# Altium PCB booster.PcbDoc
Units mm, origin at the board's own origin, x right, y up, seen from the top; angles counter-clockwise.
Board outline 164.34 x 131.06 mm, 2 copper layers (Top Layer, Bottom Layer); 86 components, 44 nets, 236 pads, 353 vias.
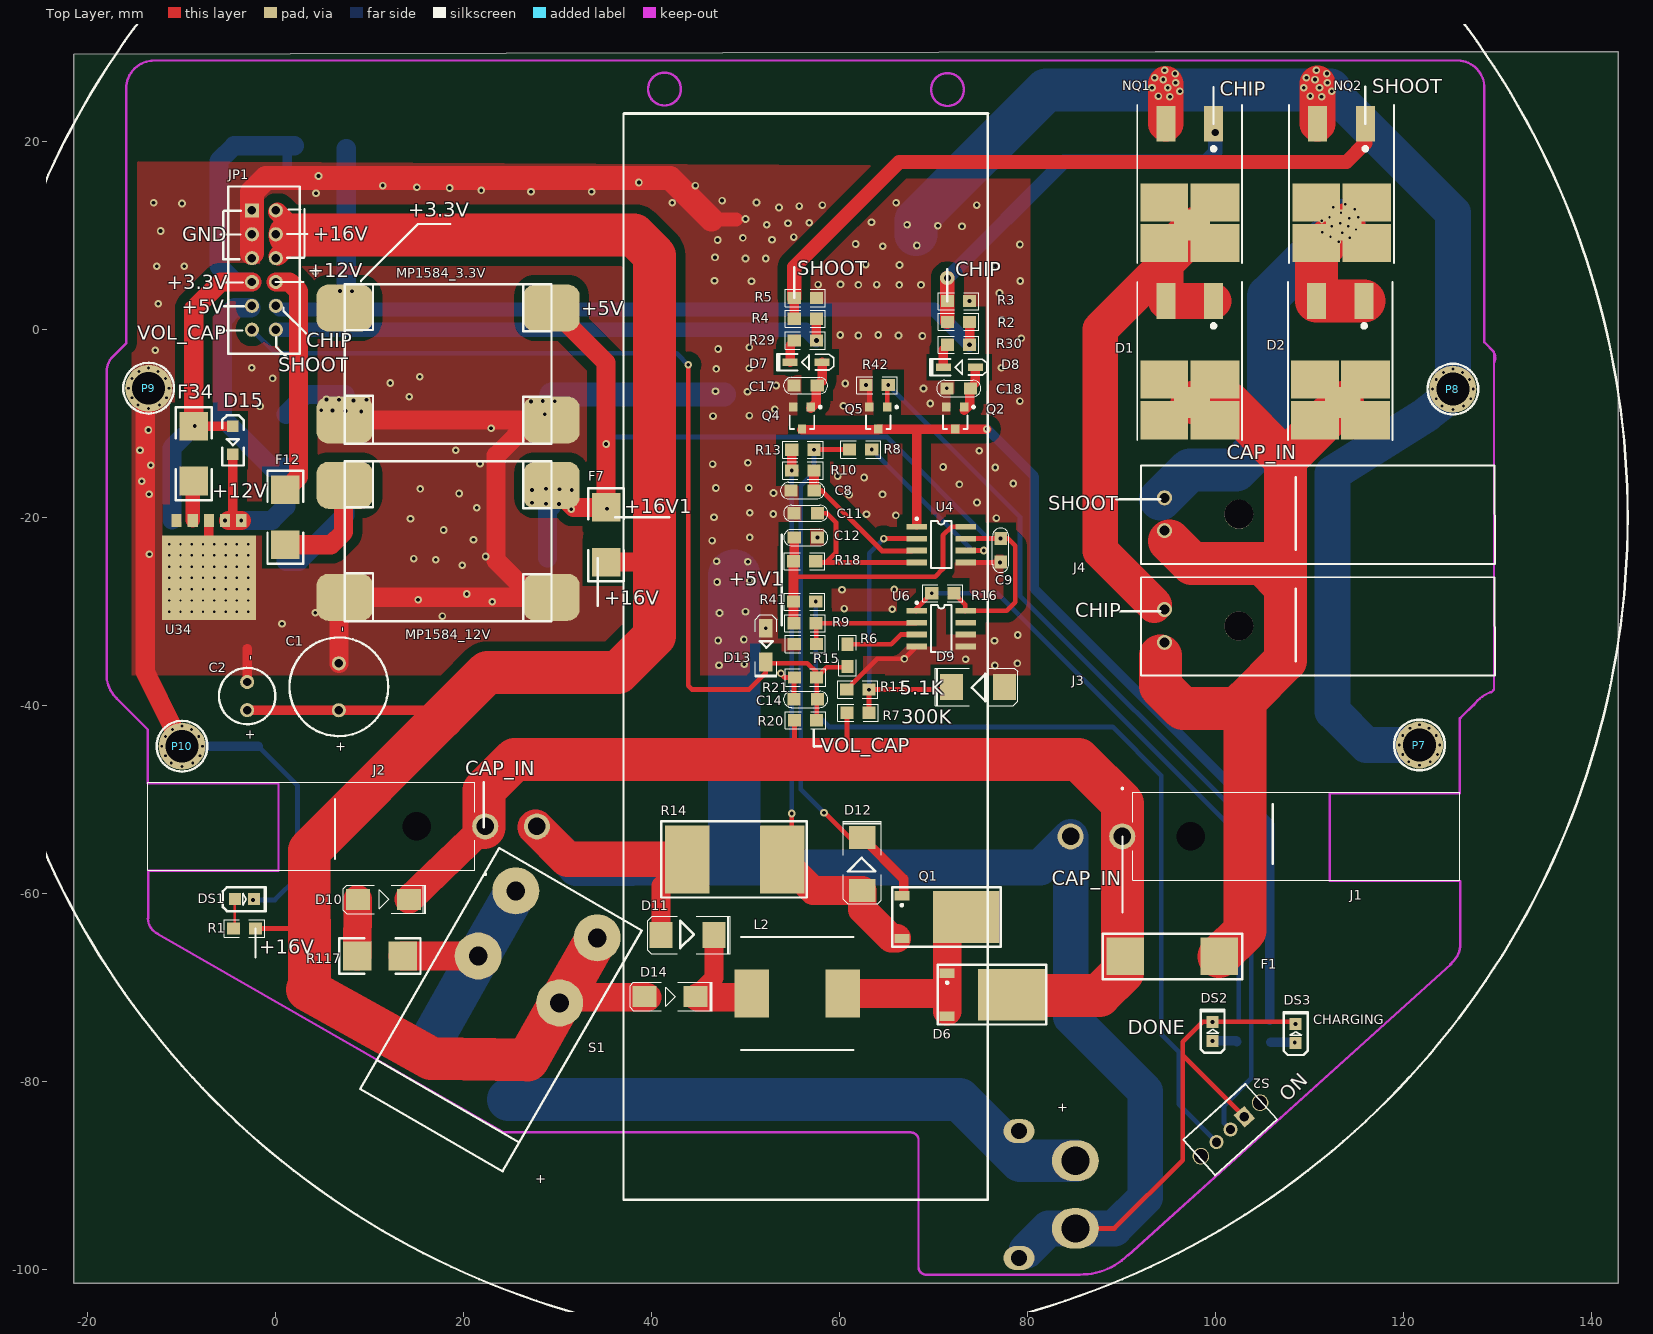
[diagram p0: Top Layer view]
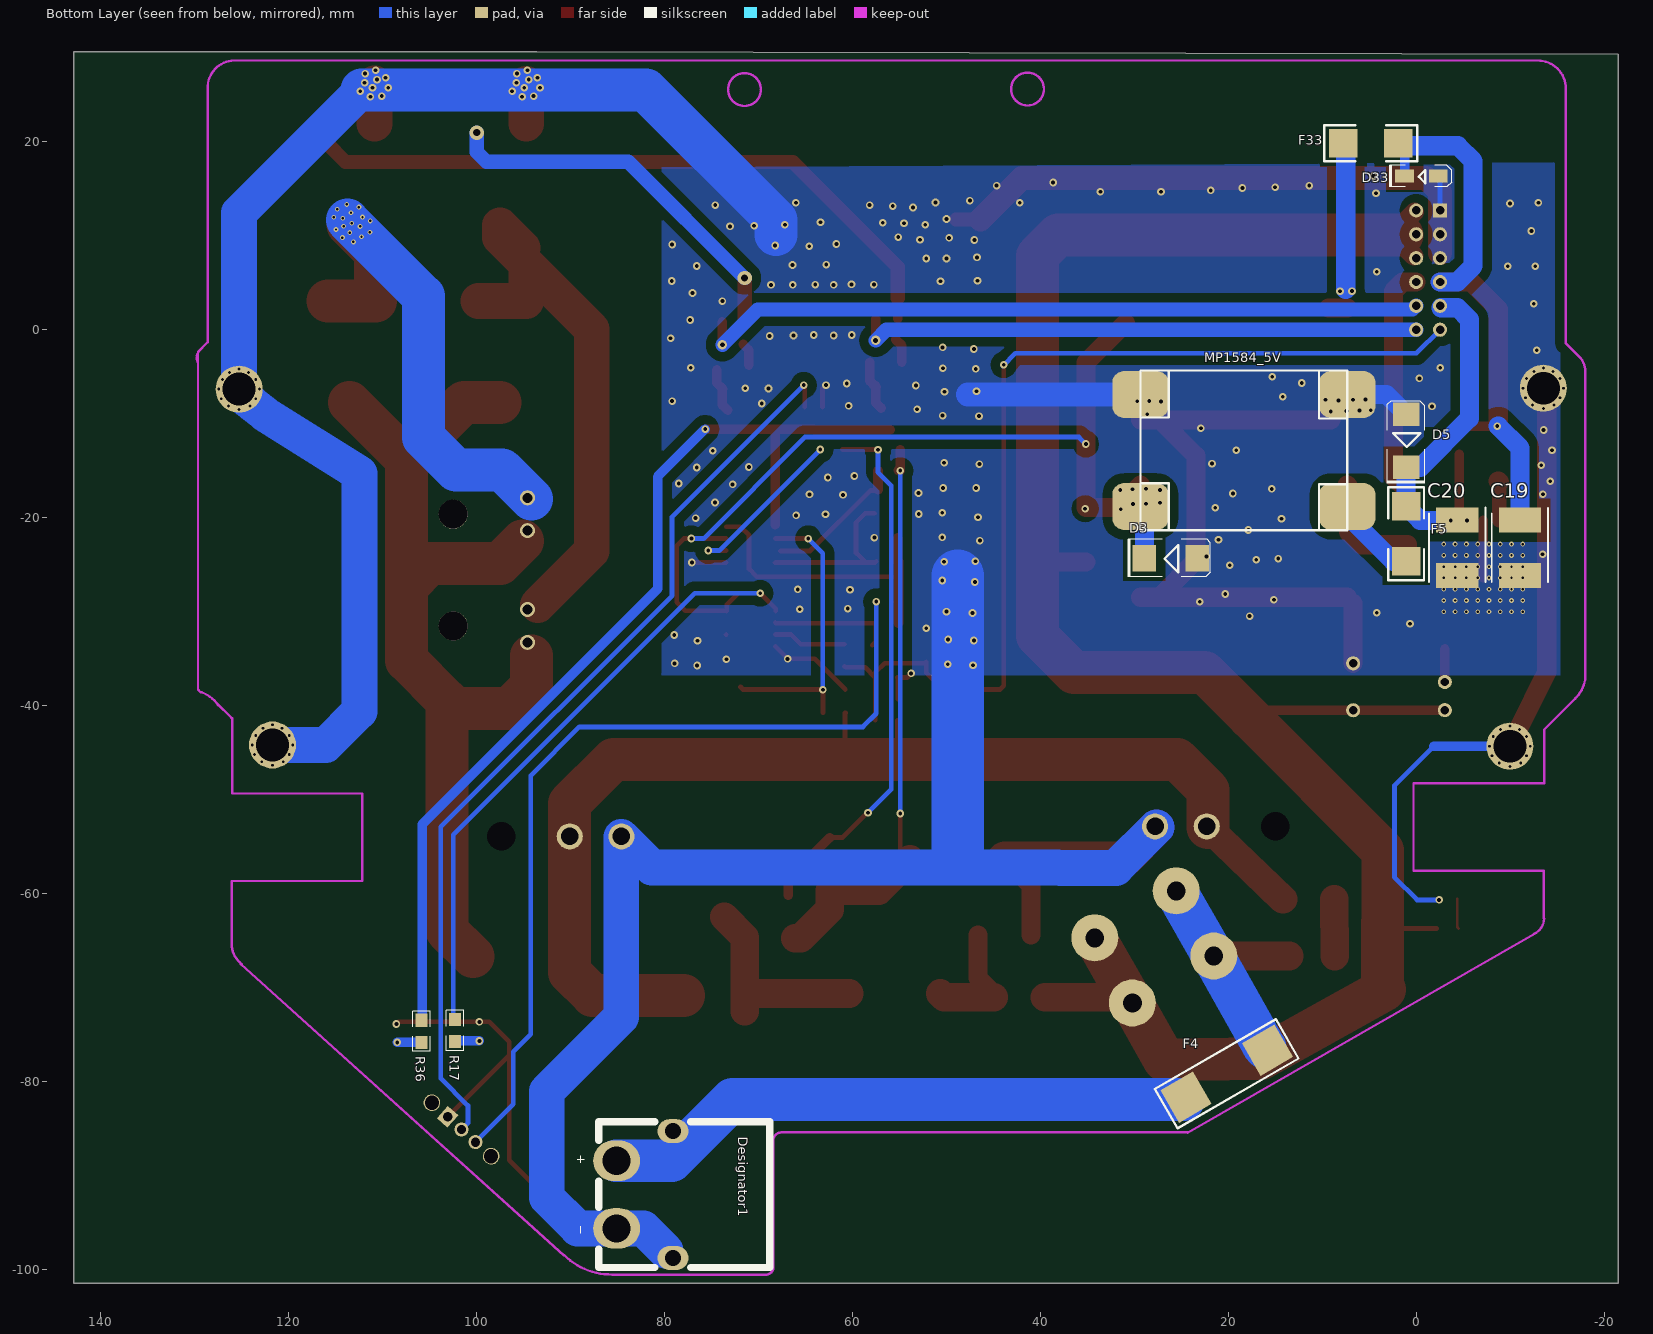
[diagram p1: Bottom Layer view, seen from below]

## Layer stack, top to bottom
Top Solder: solder mask 0.0102, Solder Resist, Dk 3.5
Top Layer: signal copper 0.0356
Dielectric1: dielectric 0.32, FR-4, Dk 4.8
Bottom Layer: signal copper 0.0356
Bottom Solder: solder mask 0.0102, Solder Resist, Dk 3.5

## Board outline
-21.488,29.312 -21.488,-101.498 23.216,-101.498 142.85,-101.498 142.85,-62.89 142.85,29.566 93.574,29.566

## Design rules (kind name [scope] priority, off if disabled: settings)
Clearance [InNet('GND') And InPolygon] p1: gap=1.016 ignorepadtopadclearanceinfootprint=FALSE
Clearance Clearance_1 [All] p2: gap=0.254 ignorepadtopadclearanceinfootprint=FALSE except(0: Arc-Hole Track-Hole SMDPad-Hole THPad-Hole Via-Hole Fill-Hole Poly-Hole Region-Hole Text-Hole)
ComponentClearance [All] p1: gap=0.025 collisioncheckmode=3 verticalgap=0.254 showdistances=FALSE
FabricationTestPointUsage TestPointUsage [All] p1: valid=0 allowmultiple=FALSE
FabricationTestpoint Testpoint [All] p1: side=3 testpointundercomponent=TRUE minsize=1.016 maxsize=2.54 preferedsize=1.524 minholesize=0 maxholesize=1.016 preferedholesize=0.813 testpointgrid=0.025 allowsidetop=TRUE allowsidebottom=TRUE usegrid=TRUE gridtolerance=0
HoleSize [All] p1: absolutevalues=TRUE maxlimit=7.62 minlimit=0.025 maxpercent=80.000 minpercent=20.000
PolygonConnect [All] p1: connectstyle=Direct reliefconductorwidth=0.889 reliefentries=4 polygonreliefangle="90 Angle" airgapwidth=0.254
RoutingVias [All] p1: holewidth=0.711 width=1.27 viastyle="Through Hole" minholewidth=0.305 minwidth=0.635 maxholewidth=7.112 maxwidth=22.86
SilkToSolderMaskClearance SilkscreenOverComponentPads [IsPad] p1: minsilkscreentomaskgap=0.254 clearancetoexposedcopper=TRUE
SolderMaskExpansion [All] p1: expansion=0.102
Width [All] p1: maxlimit=7.62 minlimit=0.254 preferedwidth=2.032
25 further rules are at their usual default settings.

## Components (designator, comment, footprint, x,y, rotation, side; value= is the part's Value field where it differs from the comment)
C1 "330uF" 470uF 6.706,-37.998 r90 top
C2 "100uf" 100uF -3.048,-38.989 r90 top value=100uF
C8 "470p" 0805C 57.201,-17.122 r180 top
C9 "0.1uF" 0805C 77.14,-24.613 r90 top
C11 "2.2nf" 0805C 57.531,-19.535 r180 top value=2.2nF
C12 "0.1uf" 0805C 55.271,-22.126 r0 top value=0.1uF
C14 "0.1uF" 0805C 55.245,-39.33 r0 top
C17 "0.1uF" 0805c 55.236,-5.944 r0 top
C18 "0.1uF" 0805c 71.543,-6.248 r0 top
C19 "CAP470" CAPPM7360X200N -11.049,-23.219 r270 bottom
C20 "CAP470" CAPPM7360X200N -4.369,-23.19 r270 bottom
D1 "MBRB40250CT" D2PAK 99.797,3.073 r90 top
D2 "MBRB40250CT" D2PAK 115.824,3.073 r90 top
D3 "SMBJ18A" SMBJ6.5 23.8,-24.308 r180 bottom
D5 "SMBJ6.5CA" SMBJ6.5 1.067,-9.5 r90 bottom
D6 "VS-8EWS12SLHM3" DPAK 74.879,-70.764 r270 top
D7 "mmsz9v1t1g" sod-123 58.141,-3.454 r0 top
D8 "mmsz9v1t1g" sod-123 74.448,-3.988 r0 top
D9 "SMBJ6.5CA" SMBJ6.5 77.041,-38.024 r0 top
D10 "M7" SMA 9.22,-60.63 r180 top
D11 "SMBJ18A" SMBJ6.5 41.504,-64.414 r180 top
D12 "SMBJ18A" SMBJ6.5 62.408,-59.184 r270 top
D13 "SMF3.3" SMF33 52.146,-37.345 r90 top
D14 "M7" SMA 39.731,-70.968 r180 top
D15 "MBR120VLSFT1G SOD123" sod123 -4.572,-10.259 r270 top
D33 "SMF3.3" SMF33 3.218,16.358 r180 bottom
Designator1 "Comment" XT60PW 85.096,-88.316 r270 bottom locked
DS1 "LED2" 0805A -4.369,-60.604 r0 top
DS2 "LED2" 0805A 99.695,-75.692 r90 top
DS3 "LED3" 0805A 108.534,-75.921 r90 top
F1 "20A" 20A 93.574,-67.208 r0 top
F4 "20A" 20A 18.822,-77.826 r330 bottom
F5 "3A" 2512r 1.067,-18.796 r270 bottom
F7 "3A" 2512r 35.154,-18.898 r270 top
F12 "3A" 2512r 1.016,-17.043 r270 top
F33 "3A" 2512r 1.905,19.837 r0 bottom
F34 "3A" 2512r -8.737,-16.104 r90 top
J1 "0768250002" 0768250002_version2 90.084,-53.924 r90 top locked
J2 "0768250002" 0768250002_version2 22.286,-52.857 r270 top locked
J3 "172310-1102" 172310-1102_VERSION2 94.579,-33.271 r90 top locked
J4 "172310-1102" 172310-1102_VERSION2 94.579,-21.384 r90 top locked
JP1 "Header 4X2" 2*6_2.5mm -2.54,12.7 r270 top locked
L2 "68uH" INDPM120120X1020N 55.498,-70.637 r0 top
MP1584_3.3V "MP1584" 1584 29.337,-12.141 r180 top
MP1584_5V "MP1584" 1584 29.337,-4.343 r180 bottom
MP1584_12V "MP1584" 1584 29.337,-31.013 r180 top
NQ1 "IPB64N25S3-20" D2PAK 99.797,21.92 r90 top
NQ2 "IPB64N25S3-20" D2PAK 115.951,21.92 r90 top
P7 "BNC" hole 121.717,-44.196 r0 top locked
P8 "BNC" hole 125.273,-6.325 r0 top locked
P9 "BNC" hole -13.538,-6.223 r0 top locked
P10 "BNC" hole -9.982,-44.323 r0 top locked
Q1 "IRFR12N25D" DPAK 70.053,-62.509 r270 top
Q2 "9014" SOT23A 73.254,-8.23 r180 top
Q4 "9014" sot23a 56.947,-8.23 r180 top
Q5 "9014" SOT23a 65.07,-8.23 r180 top
R1 "4.7k" 0805R -4.521,-63.729 r0 top value=4.7K
R2 "100" 0805r 73.834,0.838 r180 top
R3 "10k" 0805R 73.834,3.048 r180 top value=10K
R4 "100" 0805r 57.527,1.168 r180 top
R5 "10k" 0805R 57.527,3.378 r180 top value=10K
R6 "10K" 0805R 60.833,-33.48 r270 top value=10k
R7 "390K" 0805R 63.145,-40.77 r180 top value=300K
R8 "10" 0805R 63.424,-12.751 r180 top
R9 "10K" 0805R 57.506,-31.245 r180 top value=10k
R10 "1k" 0805R 54.915,-14.989 r0 top
R11 "3.3K" 0805R 60.757,-38.281 r0 top value=5.1K
R13 "10k" 0805R 54.915,-12.779 r0 top
R14 "0.2" 0.2_4527R 43.774,-56.363 r0 top
R15 "1k" 0805R 57.531,-33.455 r180 top
R16 "4.7k" 0805R 69.799,-28.044 r0 top
R17 "4.7k" 0805R 102.286,-75.768 r90 bottom
R18 "27k" 0805R 57.455,-24.641 r180 top
R20 "200k" 0805R 57.557,-41.565 r180 top value=1M
R21 "3.9k" 0805R 55.194,-37.018 r0 top value=10K
R29 "10K" 0805r 55.165,-1.143 r0 top
R30 "10K" 0805r 73.834,-1.6 r180 top
R36 "4.7K" 0805r 105.867,-75.844 r90 bottom value=4.7k
R41 "10k" 0805r 57.455,-28.933 r180 top
R42 "10k" 0805r 65.177,-5.893 r180 top
R117 "20" 20_2512r 8.162,-66.65 r0 top
S1 "power" Rocker_Switch 25.539,-59.721 r330 top locked
S2 "SW-SPDT" SMALL_switch 103.086,-83.777 r312 top
U4 "UC3843P" SO-G8 70.815,-22.863 r270 top
U6 "LM393" LM393_SO-G8 70.815,-31.804 r270 top
U34 "BA33DD0WHFP" HRP5_16TO5 -7.112,-26.416 r180 top

## Footprints (in the part's own frame and the unit in brackets; to place one, negate y for a bottom-side part, rotate by r counter-clockwise, add the part's x,y. Pads: shape width x height; smd on the part's side, far side on the other; paste and mask are expansions set on the pad)
0.2_4527R [mm]
  rect 4.74x7.25 smd: 1(0,0) 2(10.1,0)
  silkscreen extent -2.77,-4.06 12.72,4.06
2*6_2.5mm [mm] "16V 12V 5V 3.3V"
  rect 1.5x1.5 hole 0.9: 1(0,0)
  round 1.5 hole 0.9: 2(0,2.54) 3(2.54,0) 4(2.54,2.54) 5(5.08,0) 6(5.08,2.54) 7(7.62,0) 8(7.62,2.54) 9(10.16,0) 10(10.16,2.54) 11(12.7,0) 12(12.7,2.54)
  silkscreen extent -2.54,-2.54 15.24,5.08
20_2512r [mil] "Chip Resistor; Body 6.3 x 3.2 mm (LxW typ)"
  rect 120x120 smd: 1(19.68,0) 2(210.32,0)
  silkscreen extent -55,-75 285,75
20A [mm]
  rect 4x4 smd: 1(-3.175,0.508) 2(6.825,0.508)
  silkscreen extent -5.59,-1.91 9.27,2.92
100uF [mm] "6*12"
  round 1.5 hole 0.9: 1(-1.5,0) 2(1.5,0)
  silkscreen extent -3,-3 3,3
470uF [mm] "Capacitor (Radial); 2 Leads"
  round 1.5 hole 0.9: 1(-2.5,0) 2(2.5,0)
  silkscreen extent -5.25,-5.25 5.25,5.25
0805A [mil]
  rect 50x50 smd: 1(0,0) 2(80,0)
  silkscreen extent -50,-50 130,50
0805C [mm]
  rect 1.4x1.3 smd: 1(-0.102,0) 2(2.388,0)
  silkscreen extent -1.22,-0.88 3.49,0.87
0805c [mm]
  rect 1.4x1.3 smd: 1(-0.102,0) 2(2.388,0)
  silkscreen extent -1.22,-0.88 3.49,0.87
0805R [mm]
  rect 1.4x1.3 smd: 1(0,0) 2(2.362,0)
  silkscreen extent -0.97,-0.91 3.33,0.91
0805r [mm]
  rect 1.4x1.3 smd: 1(0,0) 2(2.362,0)
  silkscreen extent -0.97,-0.91 3.33,0.91
1584 [mm] "5V   3.3V 12V稳压模块"
  rrect50% 6x5 smd: 1(0,-2.54) 2(0,-14.46) 3(22,-14.46) 4(22,-2.54)
  silkscreen extent 0,-17 22,0
2512r [mil] "Chip Resistor; Body 6.3 x 3.2 mm (L"
  rect 120x120 smd: 1(0,0) 2(230,0)
  silkscreen extent -80,-75 310,75
172310-1102_VERSION2 [mm]
  round 1.61 hole 1.06: 1(0,0) 2(3.5,0)
  round 3.09 hole 3.09: MH1(1.75,-7.91)
  silkscreen extent -3.54,-35.16 6.93,2.5
0768250002_version2 [mm]
  round 2.775 hole 1.85: 1(0,0) 2(0,5.5)
  round 1.525 hole 3.05: MH1(0,-7.3)
  silkscreen extent -4.68,-35.93 5.2,0.1
CAPPM7360X200N [mm] "470uF贴片"
  rect 2.65x4.5 smd: 1(-2.95,0) 2(2.95,0)
  silkscreen extent -4.28,-3 3.65,3, body extent -3.65,-3 3.65,3, height 2
D2PAK [mil]
  rect 150x80 smd: 1(0,0) 3(0,200)
  rect 160x205 smd: 2(-500,-6) 2(-330,-6)
  rect 160x200 smd: 2(-500,206) 2(-330,206)
  rect 130x150 smd: 2(-425,90)
  silkscreen extent -583,-119 79,319
DPAK [mm] "D-PAK/TO-252-AA;"
  rect 1x1.6 smd: 1(-2.285,-3.425) 3(2.285,-3.425)
  rect 5.5x7.1 smd: 2(0,3.425)
  silkscreen extent -3.18,-4.45 3.18,7.11
hole [mm]
  round 5 hole 3.5: 1(0,0)
  silkscreen extent -2.7,-2.7 2.7,2.7
HRP5_16TO5 [mm]
  rect 1.07x1.37 smd: 1(-3.429,-6.125) 2(-1.709,-6.125) 3(0.011,-6.125) 4(1.731,-6.125) 5(3.451,-6.125)
  rect 10x9 smd: FIN(0,0)
INDPM120120X1020N [mm]
  rect 3.65x5.1 smd: 1(-4.85,0) 2(4.85,0)
  silkscreen extent -6,-6 6,6, body extent -6,-6 6,6, height 10.2
LM393_SO-G8 [mm] "Small Outline; 8 Leads; Body Width 3.9 mm; Pitch 1.27 mm"
  rect 0.6x2.2 smd: 1(-1.905,-2.6) 2(-0.635,-2.6) 3(0.635,-2.6) 4(1.905,-2.6) 5(1.905,2.6) 6(0.635,2.6) 7(-0.635,2.6) 8(-1.905,2.6)
  silkscreen extent -2.88,-2.72 2.5,1.1
Rocker_Switch [mm]
  round 5 hole 2: 1(10,0) 2(0,0) 3(10,-8) 4(0,-8)
  silkscreen extent -3.81,-26.55 13.72,3.05
SMA [mm]
  rect 2.56x2.2 smd: 1(0.5,0) 2(-4.948,0)
  silkscreen extent -6.73,-1.5 2.03,1.5
SMALL_switch [mm] "开关"
  round 1.778 hole 1.5: 0(0,2.25) 0(0,-6.25)
  rect 1.778x1.5 hole 1: 1(0,0)
  round 1.5 hole 1: 2(0,-2) 3(0,-4)
  silkscreen extent -2.54,-6.48 2.54,2.41
SMBJ6.5 [mm]
  rect 2.475x2.8 smd: 1(0.5,0) 2(-5.133,0)
  silkscreen extent -6.85,-2 1.91,2
SMF33 [mm] "TVS 二极管 3.3V"
  rect 2x1.4 smd: 1(5.58,0) 2(1.988,0)
  silkscreen extent 0.39,-1.14 6.98,1.14
SO-G8 [mm]
  rect 0.6x2.2 smd: 1(-1.905,-2.6) 2(-0.635,-2.6) 3(0.635,-2.6) 4(1.905,-2.6) 5(1.905,2.6) 6(0.635,2.6) 7(-0.635,2.6) 8(-1.905,2.6)
  silkscreen extent -2.88,-2.72 2.5,1.1
sod123 [mm]
  rect 1.25x1.22 smd: 1(0,0) 2(3,0)
  silkscreen extent -1.14,-1.14 4.19,1.14
sod-123 [mm]
  rect 1.6x0.8 smd: 1(0,0) 2(-3.4,0)
  silkscreen extent -4.83,-0.89 1.24,0.89
SOT23A [mm] "SOT-23; 3 Leads; Body 3.0 x 2.5 mm, inc. leads (LxW max)"
  rect 0.9x0.95 smd: 1(0,0) 2(1.9,0) 3(0.95,2.35)
  silkscreen extent -1.13,-0.12 2.25,2.35
sot23a [mm] "SOT-23; 3 Leads; Body 3.0 x 2.5 mm, inc. leads (LxW max)"
  rect 0.9x0.95 smd: 1(0,0) 2(1.9,0) 3(0.95,2.35)
  silkscreen extent -1.13,-0.12 2.25,2.35
SOT23a [mm] "SOT-23; 3 Leads; Body 3.0 x 2.5 mm, inc. leads (LxW max)"
  rect 0.9x0.95 smd: 1(0,0) 2(1.9,0) 3(0.95,2.35)
  silkscreen extent -1.13,-0.12 2.25,2.35
XT60PW [mm]
  oval 4.318x5 hole 3: 1(7.327,0) 2(0.127,0)
  oval 2.54x3.302 hole 1.7: 1(10.477,6) 2(-3.023,6)
  silkscreen extent -4.02,-4.17 11.48,16.29, body extent -4.04,-1.51 11.46,16.69, height 8.4

## Part data
C1: library part Cap2, "Capacitor", Published=23-Sep-2002, Publisher="Altium Limited"
C2: library part "Cap Pol1", "Polarized Capacitor (Radial)", Manufacturer="Generic Components", Class=Passive, Published=08/06/2000, Publisher="Altium Hobart Technology Centre", SubClass=Capacitor
C8 C11 C12: library part Cap, "Capacitor", Manufacturer="Generic Components", Class=Passive, Published=08/06/2000, Publisher="Altium Hobart Technology Centre", SubClass=Capacitor
C9 C14 C17 C18: library part Cap, "Capacitor", LatestRevisionDate=17-Jul-2002, LatestRevisionNote="Re-released for DXP Platform.", Published=8-Jun-2000, Publisher="Altium Limited"
C19 C20: library part T523H477M016APE0707280, "470uF电容贴片", Manufacturer_Name=Kemet, Mouser Part Number=80-T523H477M16P070LR, Datasheet Link=https://api.kemet.com/component-edge/download/datasheet/T523H477M016APE0707280.pdf, Height=2mm, Manufacturer_Part_Number=T523H477M016APE0707280, Mouser Price/Stock=https://www.mouser.com/Search/Refine.aspx?Keyword=80-T523H477M16P070LR
D1 D2 D6: library part MBRB1545CT, "Schottky Rectifier", Manufacturer="International Rectifier", Class=Discrete, Note="Terminal 2 is the TAB and is electrically connected to the cathode", Published=8/06/2000, Publisher="Altium Hobart Technology Centre", SubClass="Rectifier - Schottky"
D3 D5 D7 D8 D9 D11 D12 D13 D33: library part "D Zener", "Zener Diode", LatestRevisionDate=17-Jul-2002, LatestRevisionNote="Re-released for DXP Platform.", PackageReference=DIODE-0.7, Published=8-Jun-2000, Publisher="Altium Limited"
D10 D14 D15: library part Diode, "Default Diode", Manufacturer="Generic Components", Class=Discrete, Published=08/06/2000, Publisher="Altium Hobart Technology Centre", SubClass="Diode - Switching"
Designator1: library part "Header 2", "Header, 2-Pin", LatestRevisionDate=17-Jul-2002, LatestRevisionNote="Re-released for DXP Platform.", Publisher="Altium Limited"
DS1: "Typical RED, GREEN, YELLOW, AMBER GaAs LED", COLOUR=GREEN, Manufacturer="Generic Components", Class=Optoelectronic, Published=08/06/2000, Publisher="Altium Hobart Technology Centre", SubClass=LED
DS2: "Typical RED, GREEN, YELLOW, AMBER GaAs LED", Manufacturer="Generic Components", Class=Optoelectronic, Published=08/06/2000, Publisher="Altium Hobart Technology Centre", SubClass=LED
DS3: library part LED2, "Typical RED, GREEN, YELLOW, AMBER GaAs LED", COLOUR=GREEN, PackageDocument=Feb-2002, LatestRevisionDate=17-Jul-2002, LatestRevisionNote="Re-released for DXP Platform.", PackageReference=3.2X1.6X1.1, Published=8-Jun-2000, Publisher="Altium Limited"
F1: library part "Fuse 2", LatestRevisionDate=17-Jul-2002, LatestRevisionNote="Re-released for DXP Platform.", Published=8-Jun-2000, Publisher="Altium Limited"
F4: library part "Fuse 1", "Fuse", LatestRevisionDate=17-Jul-2002, LatestRevisionNote="Re-released for DXP Platform.", PackageReference=PIN-W2/E2.8, Published=8-Jun-2000, Publisher="Altium Limited"
F5 F7 F12 F33 R1 R6 R7 R8 R9 R10 R11 R13 R14 R15 R16 R17 R18 R20 R21 R29 R30 R36 R41 R42 R117: library part Res1, "Resistor", Manufacturer="Generic Components", Class=Passive, Published=08/06/2000, Publisher="Altium Hobart Technology Centre", SubClass=Resistor
F34: library part Res1, "Resistor", LatestRevisionDate=17-Jul-2002, LatestRevisionNote="Re-released for DXP Platform.", Published=8-Jun-2000, Publisher="Altium Limited"
J1 J2: "Connector", Manufacturer_Name=Molex, Mouser Part Number=N/A, Datasheet Link=https://www.molex.com/pdm_docs/sd/768250002_sd.pdf, Height=16mm, Manufacturer_Part_Number=0768250002, Mouser Price/Stock=https://www.mouser.com/Search/Refine.aspx?Keyword=N%2FA
J3 J4: "Connector", Manufacturer_Name=Molex, Mouser Part Number=538-172310-1102, RS Part Number=8951880, Allied_Number=70617676, Allied Price/Stock=http://www.alliedelec.com/molex-incorporated-172310-1102/70617676/, Datasheet Link=http://www.farnell.com/cad/1986622.pdf, Manufacturer_Part_Number=172310-1102, Mouser Price/Stock=https://www.mouser.com/Search/Refine.aspx?Keyword=538-172310-1102, RS Price/Stock=http://uk.rs-online.com/web/p/products/8951880
JP1: library part "Header 6X2", "Header, 4-Pin, Dual row", LatestRevisionDate=17-Jul-2002, LatestRevisionNote="Re-released for DXP Platform.", Publisher="Altium Limited"
L2: library part Inductor, "Inductor", Code_IEC=1005, Code_JEITA=0402, LatestRevisionDate=17-Jul-2002, LatestRevisionNote="Re-released for DXP Platform.", PackageReference=0402-A, Published=8-Jun-2000, Publisher="Altium Limited"
NQ1 NQ2: library part IRFP460, "HEXFET Power MOSFET", Manufacturer="International Rectifier", Class=Discrete, Note="Pin 2 is electrically connected to the Heatsink (4).", Published=8/06/2000, Publisher="Altium Hobart Technology Centre", SubClass="MOSFET - Power"
P7 P8 P9 P10: "BNC Elbow Connector", LatestRevisionDate=17-Jul-2002, LatestRevisionNote="Re-released for DXP Platform.", Publisher="Altium Limited"
Q1: library part NMOS-2, "N-Channel Power MOSFET", Code_JEDEC=TO-220-AB, DatasheetDocument=PD-9.814, LatestRevisionDate=17-Jul-2002, LatestRevisionNote="Re-released for DXP Platform.", Note="Pin 2 is electrically connected to pin 4.", PackageReference=TO-220AB, Published=8-Jun-2000, Publisher="Altium Limited"
Q2 Q4 Q5: library part BC817-40, "NPN General Purpose Amplifier", Manufacturer="Fairchild Semiconductor", Class=Discrete, Published=8/06/2000, Publisher="Altium Hobart Technology Centre", Revised="11-July-2000: SIM Model Added.", SubClass="BJT - Low Power"
R2 R3 R4 R5: library part "Res Semi", "Semiconductor Resistor", Manufacturer="Generic Components", Class=Passive, Published=08/06/2000, Publisher="Altium Hobart Technology Centre", SubClass=Resistor
S1: library part "Header 2X2", "Header, 2-Pin, Dual row", LatestRevisionDate=17-Jul-2002, LatestRevisionNote="Re-released for DXP Platform.", Publisher="Altium Limited"
S2: "SPDT Subminiature Toggle Switch, Right Angle Mounting, Vertical Actuation", ComponentLink1Description="Manufacturer Link", ComponentLink1URL=http://www.apem.com, DatasheetDocument=05-Dec-2000, LatestRevisionDate=17-Dec-2003, LatestRevisionNote="Schematic revised, PCB Footprint replaced.", PackageReference=TL36WW15050, Published=24-Mar-1999, Publisher="Altium Limited"
U4: "Current-Mode PWM Controller", PackageDocument=Jun-1999, Code_JEDEC=MO-001-AN, ComponentLink1Description="Manufacturer Link", ComponentLink1URL=http://www.ti.com/, DatasheetDocument=Dec-1999, LatestRevisionDate=6-Jun-2005, LatestRevisionNote="Stylized 3D Model Added.", PackageReference=P008, Published=15-Apr-2002, Publisher="Altium Limited"
U34: library part HRP5-16TO5

## Via types
v1: diameter 0.813, hole 0.406, Top Layer to Bottom Layer, 228 vias
v2: diameter 0.508, hole 0.254, Top Layer to Bottom Layer, 73 vias
v3: diameter 0.635, hole 0.305, Top Layer to Bottom Layer, 48 vias
v4: diameter 1.524, hole 0.762, Top Layer to Bottom Layer, 2 vias
v5: diameter 1.016, hole 0.508, Top Layer to Bottom Layer, 2 vias

## Nets (pads, with @x,y where several pads share a name; then routed paths per layer and width w, separated by ;. In a path a pad name is that pad's centre, name@x,y a point inside that pad or via, vN(x,y) a via of type N, cw(c..) or ccw(c..) an arc to the next point about the centre after c; other vN are vias at no path point)
+3.3V: C19.1 D15.1 D33.2 F33.1 F34.2 JP1.7 | length 62.9
  Top Layer w1.016: F34.2 -8.735,-10.259 D15.1
  Top Layer w2.032: F34.2 -8.737,2.21 -5.867,5.08 JP1.7
  Bottom Layer w1.016: D33.2 1.23,19.162 1.651,19.583 F33.1
  Bottom Layer w2.032: C19.1 -11.049,-12.573 v1@-8.737,-10.262 ; JP1.7 -4.369,5.08 -6.07,6.782 -6.07,17.958 -4.445,19.583 1.651,19.583 F33.1@1.956,19.583
  other v1: -8.636,-10.259
+5V: C20.1 D5.2 D15.2 F5.1 JP1.9 U34.1 U34.2 | length 40
  Top Layer w1.016: -4.572,-19.402 D15.2
  Top Layer w2.032: U34.2@-5.029,-20.291 v1(-3.683,-20.291)
  Bottom Layer w2.032: v1(-3.683,-20.291) -0.428,-20.291 F5.1 D5.2 -0.455,-14.633 -5.664,-9.423 -5.664,1.092 -4.419,2.337 JP1.9@-2.641,2.337
  other v1: -5.403,-20.291
+5V1: C12.1 R9.2 R18.2 R41.2 U4.8 | length 32
  Top Layer w0.508: R9.2@55.093,-31.245 R9.2@55.118,-31.27 ; 55.093,-26.289 70.158,-26.289 70.993,-25.454 70.993,-21.898 71.933,-20.958 U4.8
  Top Layer w1.016: R9.2@55.093,-31.245 R41.2 ; R18.2 55.093,-26.289 55.093,-28.883 R41.2@55.194,-28.984 ; R18.2@55.169,-24.819 C12.1
+12V: F12.1 JP1.8 | length 24.5
  Top Layer w2.032: JP1.8 1.448,5.08 2.413,4.115 2.413,-15.646 F12.1
+16V: C1.1 C2.1 D14.1 F7.2 JP1.2 JP1.4 JP1.6 R1.2 S1.1 S1.3 | length 228.3
  Top Layer w0.508: R1.2 2.012,-63.729
  Top Layer w1.016: C2.1 -3.038,-40.498 C1.1 16.953,-40.498 17.717,-41.262 ; 2.012,-63.729 2.265,-63.475 ; 39.853,-24.74 40.31,-25.197
  Top Layer w2.032: JP1.2@0.191,12.509 2.083,10.617 1.524,10.058 1.905,9.677 1.905,9.525 JP1.6@0.229,7.849 ; F7.2 39.853,-24.74
  Top Layer w3.048: S1.3@30.236,-71.67 30.863,-71.044 D14.1@39.505,-71.044
  Top Layer w4.572: 1.524,10.058 38.126,10.058 40.31,7.874 40.31,-25.197 40.31,-32.588 36.424,-36.474 22.505,-36.474 17.717,-41.262 3.556,-55.423 3.559,-70.025 ; 3.348,-70.236 3.42,-70.276 16.536,-77.561 26.797,-77.699 S1.3 ; S1.3@30.236,-71.67 S1.1@34.181,-64.711
+16V1: C9.2 D3.2 F7.1 MP1584_3.3V.2 MP1584_5V.2 MP1584_12V.2 R16.2 U4.7 U6.8 | length 100.2
  Top Layer w0.508: R16.2 73.365,-29.247 U6.8@73.365,-29.924 ; U6.8 77.794,-29.899 78.689,-29.003 78.689,-22.987 77.927,-22.225 v1(77.14,-22.225) 77.137,-22.228 U4.7
  Top Layer w2.032: MP1584_12V.2 31.681,-18.898 F7.1 v1(35.154,-12.167) 35.154,-3.498 MP1584_3.3V.2@30.954,0.702
  Bottom Layer w0.508: v1(35.154,-12.167) 35.89,-11.43 65.05,-11.43 75.845,-22.225 v1(77.14,-22.225)
  Bottom Layer w2.032: D3.2 28.933,-19.208 MP1584_5V.2
  other v1: 31.445,-19.101 35.23,-19.048 30.15,-18.542 28.753,-18.517 27.254,-18.415 31.496,-17.069 27.254,-17.043 30.2,-16.967 28.753,-16.916
BATTERY: Designator1.2 F4.2 | length 63.1
  Bottom Layer w4.572: F4.2@24.74,-81.915 72.746,-81.915 79.274,-88.443 Designator1.2@85.096,-88.443
BATTERY_IN: F4.1 R117.2 S1.2 S1.4 | length 26.9
  Top Layer w3.048: R117.2 S1.4
  Bottom Layer w4.572: F4.1@16.109,-76.394 21.61,-66.689 S1.2@25.398,-60.005
CHIP: JP1.10 R2.1 R30.1 | length 77.7
  Top Layer w1.016: R30.1@73.834,-1.292 R2.1
  Bottom Layer w1.524: JP1.10 0.381,2.159 70.075,2.159 v5(73.834,-1.6)
CMPEN: Q2.3 Q4.3 Q5.3 R36.2 U4.1 | length 105.2
  Top Layer w0.508: 68.165,-10.58 68.215,-10.63
  Top Layer w1.016: Q4.3@55.997,-10.63 Q5.3@64.12,-10.63 ; Q5.3 68.165,-10.58 Q2.3 v1(75.667,-10.58) ; U4.1@68.215,-20.752 68.215,-10.63
  Bottom Layer w1.016: v1(75.667,-10.58) 80.721,-15.634 80.721,-27.584 105.791,-52.654 R36.2@105.791,-73.482
COIL_CHIP: D1.1 D1.3 J3.2 NQ1.2 | length 59.3
  Top Layer w3.81: 93.478,-29.28 87.732,-23.534 87.732,0.051 94.717,7.036 ; NQ1.2@95.085,8.7 97.511,11.125 97.511,9.83 94.717,7.036 ; D1.1 D1.3 94.717,7.036
COIL_SHOOT: D2.1 D2.3 J4.2 NQ2.2 | length 55
  Top Layer w4.572: NQ2.2@113.665,11.125 110.744,8.204 D2.3 D2.1
  Bottom Layer w4.572: J4.2@94.147,-18.037 97.274,-14.91 102.21,-14.91 105.664,-11.455 105.664,3.581 113.741,11.659
  other v2: 113.106,9.347 114.275,9.804 112.243,9.906 113.487,10.338 111.354,10.363 114.961,10.668 112.395,10.998 114.148,11.024 113.284,11.328 111.303,11.582 114.249,11.862 115.189,11.963 112.141,11.989 113.36,12.446 114.834,12.827 112.522,13.056 113.818,13.335
CURRENT: C8.1 R10.2 U4.3 | length 15
  Top Layer w0.508: C8.1 58.09,-17.122 64.516,-23.549 U4.3@67.64,-23.549
  Top Layer w1.016: C8.1@57.252,-17.021 57.277,-16.995 R10.2
GND: C1.2 C2.2 C8.2 C9.1 C11.2 C12.2 C14.1 C17.1 C18.1 C19.2 C20.2 D3.1 D5.1 D9.1 D11.1 D13.1 D33.1 Designator1.1 DS1.2 DS2.2 DS3.2 J1.2 J2.2 JP1.1 JP1.3 JP1.5 MP1584_3.3V.1 MP1584_3.3V.4 MP1584_5V.1 MP1584_5V.4 MP1584_12V.1 MP1584_12V.4 NQ1.3 NQ2.3 P7.1 P8.1 P9.1 P10.1 Q2.2 Q4.2 Q5.2 R3.1 R5.1 R11.1 R14.1 R15.2 R21.1 R42.2 S2.1 U4.5 U6.4 U6.5 U6.6 U34.3 U34.FIN | length 633.7
  Top Layer w0.508: P10.1 P10.1@-9.322,-44.983 ; U34.FIN@-7.123,-26.405 U34.FIN ; v1(53.747,-36.576) 54.189,-37.018 R21.1 55.144,-37.069 C14.1 ; R11.1 64.011,-35.027 v1(66.897,-35.027) U6.4 ; v1(62.814,-5.893) 63.17,-6.248 Q5.2 ; U6.6 U6.6@73.449,-32.472 ; U4.5 v1(77.086,-24.768) C9.1 ; Designator1.1@85.096,-95.643 89.244,-95.643 96.52,-88.367 96.52,-77.211 ; S2.1 96.52,-77.211 ; v1(108.534,-73.889) 108.306,-73.66 v1(99.695,-73.66) 98.654,-73.66 96.52,-75.794 96.52,-77.211
  Top Layer w1.016: U34.FIN@-7.123,-26.405 -7.123,-22.816 U34.3 ; C2.2 -3.048,-33.934
  Top Layer w1.524: MP1584_12V.4@6.706,-29.105 MP1584_12V.4 ; 46.381,11.735 48.971,11.735
  Top Layer w2.032: P9.1@-13.894,-5.07 -13.894,-10.668 -13.894,-14.427 -13.894,-36.398 -10.887,-42.49 -10.839,-42.587 -10.734,-42.8 P10.1 ; C1.2 MP1584_12V.4@6.706,-29.105 ; MP1584_12V.4 MP1584_12V.1@27.356,-28.473 ; MP1584_3.3V.4@9.093,-9.601 MP1584_3.3V.1@27.241,-9.601 ; MP1584_12V.1 MP1584_12V.1@27.356,-28.473 ; MP1584_3.3V.1 MP1584_3.3V.1@27.241,-9.601 ; D11.1 41.004,-59.132 R14.1 ; MP1584_3.3V.1@27.241,-9.601 23.444,-13.398 23.444,-24.562 MP1584_12V.1@27.356,-28.473
  Top Layer w2.54: JP1.5@-2.54,8.179 JP1.3 JP1.1 -2.54,14.664 -1.049,16.154 4.535,16.154 33.604,16.154 41.961,16.154 46.381,11.735
  Top Layer w3.81: J2.2@27.634,-52.959 31.037,-56.363 R14.1 ; NQ1.3 94.717,24.867 94.717,26.162 ; NQ2.3 110.871,24.867 110.871,26.213
  Bottom Layer w0.508: P10.1 v3(-7.823,-44.323) ; JP1.1 -2.54,16.18 D33.1 ; v1(-2.438,-60.681) -0.101,-60.681 2.312,-58.268 2.312,-48.514 -1.879,-44.323
  Bottom Layer w1.016: v3(-7.823,-44.323) -1.879,-44.323
  Bottom Layer w2.032: D5.1 3.183,-6.883 MP1584_5V.4
  Bottom Layer w2.54: MP1584_5V.1 47.727,-6.883
  Bottom Layer w3.81: J2.2@27.634,-52.959 31.952,-57.277 37.872,-57.277 ; 38.176,-57.226 81.358,-57.226 84.609,-53.975 84.609,-73.128 92.532,-81.051 92.532,-92.354 89.244,-95.643 85.096,-95.643 82.246,-95.643 Designator1.1@79.877,-98.012 ; v1@112.217,25.502 125.273,12.446 125.273,-6.706 125.265,-6.377 125.264,-6.325 125.263,-6.273 125.248,-5.664 125.238,-5.707 125.106,-6.286 124.999,-6.755 124.932,-7.048 124.44,-7.44 124.173,-7.653 P8.1@123.927,-7.849 ; P7.1 v3(119.558,-44.196) 116.053,-44.196 112.471,-40.615 112.471,-15.285 122.515,-8.975 123.911,-7.862 P8.1@123.927,-7.849
  Bottom Layer w4.572: 68.148,10.109 68.148,11.684 81.966,25.502 93.244,25.502 94.92,25.502 109.398,25.502 111.862,25.502 v1@112.217,25.502
  Bottom Layer w5.588: 48.768,-55.143 48.768,-32.969 48.768,-29.997 48.768,-26.695 48.768,-26.162
  other v1: 76.53,-35.738 47.168,-35.712 49.86,-35.611 78.918,-35.509 73.415,-35.077 76.48,-33.096 47.066,-33.071 49.81,-32.969 78.969,-32.487 52.146,-31.765 0.661,-31.293 17.729,-30.48 47.219,-30.15 4.191,-30.124 49.987,-29.997 65.608,-29.743 60.503,-29.679 23.038,-28.956 15.139,-28.727 20.32,-28.118 60.249,-27.673 65.812,-27.635 46.965,-26.848 50.43,-26.695 19.843,-25.07 50.237,-24.693 46.914,-24.641 17.018,-24.486 14.681,-24.359 22.327,-24.13 -13.462,-23.901 46.431,-22.447 21.031,-22.352 57.658,-22.126 50.43,-22.098 17.856,-21.311 14.326,-20.117 76.683,-20.052 46.635,-19.964 65.989,-19.761 62.865,-19.634 52.934,-19.609 50.43,-19.482 21.387,-18.948 74.625,-18.39 60.994,-17.573 64.567,-17.526 -13.487,-17.501 19.507,-17.424 52.959,-17.374 15.367,-16.942 46.838,-16.84 50.343,-16.84 72.753,-16.459 78.486,-16.358 -14.275,-16.129 62.611,-15.723 59.792,-15.57 76.556,-14.656 71.019,-14.605 -13.309,-14.427 46.482,-14.3 21.73,-14.249 50.237,-14.148 74.854,-12.878 -14.452,-12.827 19.152,-12.827 -13.563,-10.668 22.911,-10.49 46.533,-9.195 50.394,-9.144 28.626,-8.992 9.093,-8.687 7.417,-8.636 6.045,-8.611 4.826,-8.56 53.112,-8.458 -1.68,-8.153 60.401,-8.103 69.647,-7.849 27.153,-7.645 29.693,-7.62 28.397,-7.595 79.19,-7.595 8.255,-7.544 6.706,-7.442 9.652,-7.442 5.385,-7.417 14.199,-7.141 50.191,-6.604 46.787,-6.553 68.936,-6.248 71.4,-6.223 53.239,-5.938 60.605,-5.715 12.167,-5.664 -0.346,-5.182 15.316,-5.004 46.863,-4.166 50.368,-4.089 -2.555,-4.039 77.198,-4.039 -12.827,-2.184 47.066,-2.057 50.394,-1.88 79.35,-0.914 68.809,-0.66 62.002,-0.61 66.269,-0.61 60.071,-0.559 64.11,-0.559 77.267,1.041 -12.522,2.769 73.834,3.048 77.013,3.912 62.002,4.775 66.345,4.775 68.656,4.775 57.709,4.801 63.957,4.801 60.097,4.826 50.622,5.156 79.223,5.182 46.685,5.207 4.191,6.172 -12.674,6.756 -9.753,6.756 76.556,6.782 66.37,6.883 62.789,6.934 49.987,7.582 52.146,7.582 46.736,7.696 64.592,8.89 68.225,8.966 79.19,9.068 61.705,9.119 47.016,9.55 52.807,9.576 49.708,9.779 55.118,9.855 -12.268,10.506 73.025,10.998 70.457,11.074 52.248,11.176 67.183,11.176 54.512,11.328 56.769,11.379 63.399,11.43 49.987,11.786 53.543,13.005 55.702,13.157 58.166,13.259 74.6,13.259 -9.982,13.437 -13.005,13.513 42.19,13.513 66.015,13.513 51.156,13.538 47.498,13.741 4.267,14.529 27.153,14.681 33.604,14.681 21.87,14.834 18.491,15.088 15.012,15.164 11.379,15.342 44.653,15.342 38.634,15.672 4.535,16.358 95.149,24.79 111.303,24.79 93.929,24.867 110.084,24.867 96.215,25.375 112.37,25.375 93.244,25.756 94.92,25.756 109.398,25.756 111.074,25.756 95.758,26.289 111.913,26.289 94.437,26.619 110.592,26.619 93.523,26.822 109.677,26.822 95.707,27.254 111.862,27.254 94.59,27.61 110.744,27.61
  other v2: -11.347,-30.016 -10.147,-30.016 -8.947,-30.016 -7.747,-30.016 -6.547,-30.016 -5.347,-30.016 -4.147,-30.016 -2.947,-30.016 -11.347,-28.816 -10.147,-28.816 -8.947,-28.816 -7.747,-28.816 -6.547,-28.816 -5.347,-28.816 -4.147,-28.816 -2.947,-28.816 -11.347,-27.616 -10.147,-27.616 -8.947,-27.616 -7.747,-27.616 -6.547,-27.616 -5.347,-27.616 -4.147,-27.616 -2.947,-27.616 -11.347,-26.416 -10.147,-26.416 -8.947,-26.416 -7.747,-26.416 -6.547,-26.416 -5.347,-26.416 -4.147,-26.416 -2.947,-26.416 -11.347,-25.216 -10.147,-25.216 -8.947,-25.216 -7.747,-25.216 -6.547,-25.216 -5.347,-25.216 -4.147,-25.216 -2.947,-25.216 -11.347,-24.016 -10.147,-24.016 -8.947,-24.016 -7.747,-24.016 -6.547,-24.016 -5.347,-24.016 -4.147,-24.016 -2.947,-24.016 -11.347,-22.816 -10.147,-22.816 -8.947,-22.816 -7.747,-22.816 -6.547,-22.816 -5.347,-22.816 -4.147,-22.816 -2.947,-22.816
  other v3: -9.982,-46.482 121.717,-46.355 -11.125,-46.101 -8.839,-46.101 120.574,-45.974 122.86,-45.974 -11.76,-45.339 -8.077,-45.339 119.939,-45.212 123.622,-45.212 -12.141,-44.323 123.876,-44.196 -11.76,-43.307 -8.204,-43.307 119.939,-43.18 123.495,-43.18 -10.998,-42.545 -8.966,-42.545 120.701,-42.418 122.733,-42.418 -9.982,-42.164 121.717,-42.037 125.273,-8.484 -13.538,-8.382 124.13,-8.103 126.416,-8.103 -14.681,-8.001 -12.395,-8.001 123.495,-7.341 127.178,-7.341 -15.316,-7.239 -11.633,-7.239 123.114,-6.325 127.432,-6.325 -15.697,-6.223 -11.379,-6.223 123.495,-5.309 127.051,-5.309 -15.316,-5.207 -11.76,-5.207 124.257,-4.547 126.289,-4.547 -14.554,-4.445 -12.522,-4.445 125.273,-4.166 -13.538,-4.064
NetC11_1: C11.1 R18.1 U4.4 | length 17.9
  Top Layer w0.508: R18.1 57.582,-24.768 58.598,-24.768 ; C11.1 58.649,-19.535 59.614,-20.501 59.614,-23.752 58.598,-24.768 ; U4.4@68.215,-24.793 U4.4@68.225,-24.793 ; U4.4 58.598,-24.768
NetC17_2: C17.2 D7.1 Q4.1 | length 5.6
  Top Layer w1.016: Q4.1@56.947,-8.331 57.522,-7.756 C17.2@57.522,-6.08 ; C17.2@57.48,-6.121 C17.2@57.522,-6.08 ; C17.2@57.522,-5.944 C17.2@57.522,-6.08 ; D7.1 58.141,-5.461 C17.2@57.522,-6.08
NetC18_2: C18.2 D8.1 Q2.1 | length 4.8
  Top Layer w1.016: Q2.1@73.279,-8.56 73.829,-8.01 C18.2@73.829,-6.257 ; C18.2@73.787,-6.299 C18.2@73.829,-6.257 ; D8.1@74.448,-4.267 74.448,-5.639 C18.2@73.829,-6.257
NetD6_1: D6.1 D6.3 L2.2 Q1.2 | length 21.8
  Top Layer w3.048: L2.2 71.2,-70.637 ; 71.454,-72.542 D6.1 71.454,-64.686 Q1.2@73.656,-62.484
NetD7_2: D7.2 R29.1 | length 2.7
  Top Layer w1.016: D7.2 54.741,-1.698 R29.1@55.398,-1.041
NetD8_2: D8.2 R30.2 | length 2.5
  Top Layer w1.016: D8.2@71.047,-3.785 71.047,-2.13 R30.2@71.628,-1.549
NetD10_1: D10.1 R117.1 | length 6
  Top Layer w3.048: R117.1 D10.1
NetD11_2: D11.2 D14.2 L2.1 | length 13.2
  Top Layer w2.032: D14.2 46.637,-69.01 D11.2
  Top Layer w3.048: D14.2@44.953,-71.044 50.241,-71.044 L2.1
NetD12_1: D12.1 Q1.3 R10.1 R13.1 R14.2 | length 61.1
  Top Layer w0.508: R14.2 54.915,-55.321 v1(54.915,-51.486)
  Top Layer w1.016: v1(54.915,-14.989) R10.1@55.042,-14.989 ; R13.1 54.915,-14.76 R10.1@55.118,-14.963
  Top Layer w3.048: R14.2 57.195,-59.684 D12.1 62.408,-61.697 65.48,-64.769 Q1.3@66.066,-64.769
  Bottom Layer w0.508: v1(54.915,-51.486) 54.915,-17.046 v1(54.915,-14.989)
NetD12_2: D12.2 Q1.1 R8.2 R13.2 | length 57.2
  Top Layer w0.508: v1(57.277,-12.779) 57.305,-12.751 R8.2 ; v1(58.344,-51.41) 58.42,-51.41 61.062,-54.051 D12.2
  Top Layer w1.016: D12.2 66.806,-58.449 Q1.1@66.806,-60.199
  Bottom Layer w0.508: v1(57.277,-12.779) 57.277,-15.167 55.855,-16.589 55.855,-48.92 v1(58.344,-51.41)
NetDS1_1: DS1.1 R1.1 | length 3.2
  Top Layer w0.305: R1.1 -4.369,-63.576 DS1.1
NetDS2_1: DS2.1 R17.1 | length 2.6
  Bottom Layer w1.016: v1(99.695,-75.692) 102.21,-75.692 R17.1
NetDS3_1: DS3.1 R36.1 | length 2.6
  Bottom Layer w1.016: R36.1 v1(108.433,-75.844)
NetF5_2: F5.2 MP1584_5V.3 | length 9.2
  Bottom Layer w2.032: F5.2 2.439,-24.638 7.337,-19.739 MP1584_5V.3
NetF12_2: F12.2 MP1584_12V.3 | length 11.9
  Top Layer w2.032: F12.2@0.915,-22.885 5.868,-22.885 7.214,-21.539 7.214,-16.677 MP1584_12V.3
NetF33_2: F33.2 MP1584_3.3V.3 | length 17
  Top Layer w2.032: MP1584_3.3V.3 MP1584_3.3V.3@9.329,2.319
  Bottom Layer w2.032: 7.493,4.267 F33.2@7.493,19.304
  other v1: 8.103,4.089 6.833,4.115
NetF34_1: F34.1 U34.4 | length 4.2
  Top Layer w1.524: U34.4 F34.1@-8.843,-16.209
  Top Layer w2.032: F34.1@-8.843,-16.209 F34.1
NetNQ1_1: NQ1.1 R2.2 R3.2 | length 40.8
  Top Layer w1.524: R2.2 R3.2 v4(71.472,5.507)
  Bottom Layer w1.524: v4(71.472,5.507) 83.847,17.882 98.933,17.882 99.975,18.923 v4(99.975,20.98)
NetNQ2_1: NQ2.1 R4.2 R5.2 | length 74
  Top Layer w1.016: R5.2@55.144,2.87 R5.2@55.165,2.892 ; R4.2 R5.2@55.165,2.892 ; R5.2 R5.2@55.165,2.892 ; R5.2@55.271,2.997 R5.2@55.165,2.892
  Top Layer w1.524: R5.2 55.165,6.676 66.345,17.856 113.945,17.856 115.951,19.863 NQ2.1
NetQ5_1: Q5.1 R42.1 S2.2 | length 99.1
  Top Layer w0.508: Q5.1 65.07,-5.999 v1(65.177,-5.893)
  Bottom Layer w0.508: v1(65.177,-5.893) 79.197,-19.914 79.197,-28.296 103.81,-52.908 103.81,-79.68 100.914,-82.575 100.914,-84.43 S2.2
NetR6_1: R6.1 U6.3 | length 7.8
  Top Layer w0.508: R6.1 65.481,-33.48 66.523,-32.439 U6.3
NetR9_1: R9.1 R15.1 U6.2 | length 13.2
  Top Layer w0.508: R15.1@57.887,-33.582 57.506,-33.201 R9.1 68.139,-31.245 U6.2
NetR16_1: R16.1 R17.2 U6.1 | length 65.8
  Top Layer w0.508: U6.1@68.165,-29.924 68.165,-29.679 v1(69.799,-28.044)
  Bottom Layer w0.508: v1(69.799,-28.044) 76.762,-28.044 102.489,-53.772 R17.2@102.489,-73.66
NetR41_1: R41.1 S2.3 | length 92.9
  Bottom Layer w0.508: v1(57.455,-28.933) 57.455,-40.843 58.877,-42.266 89.053,-42.266 94.234,-47.447 94.234,-74.981 96.088,-76.835 96.088,-82.428 S2.3
PWMOUT: R8.1 U4.6 | length 18.3
  Top Layer w0.508: U4.6 v1(75.337,-23.498)
  Bottom Layer w0.508: v1(63.424,-12.751) 74.171,-23.498 v1(75.337,-23.498)
SHOOT: JP1.12 R4.1 R29.2 | length 60.3
  Top Layer w1.016: v5(57.527,-1.143) R4.1
  Bottom Layer w1.524: JP1.12 56.384,0 v5(57.527,-1.143)
VBACK: D9.2 R7.1 R11.2 U4.2 | length 31.6
  Top Layer w0.508: R7.1 63.119,-40.744 R11.2 71.651,-38.281 D9.2 ; v1(64.694,-22.228) U4.2
  Bottom Layer w0.508: v1(63.145,-38.306) 63.145,-23.777 v1(64.694,-22.228)
VCAP_IN: D6.2 D10.2 F1.1 J1.1 J2.1 R7.2 R20.2 | length 131.7
  Top Layer w0.508: 42.164,-45.72 42.291,-45.593 42.291,-43.942 ; R20.2 55.194,-44.351 55.169,-44.377 60.5,-44.377 60.782,-44.094 R7.2 ; 57.938,-45.72 58.293,-45.364 ; R7.2@60.706,-40.795 R7.2@60.732,-40.77
  Top Layer w3.048: D10.2 J2.1@22.134,-52.959
  Top Layer w4.572: J2.1@22.134,-52.959 22.134,-49.012 25.426,-45.72 42.164,-45.72 57.938,-45.72 85.42,-45.72 90.109,-50.409 90.109,-53.975 90.109,-68.387 87.656,-70.841 D6.2@77.953,-70.841
VCAP_OUT: D1.2 D2.2 F1.2 J3.1 J4.1 | length 104.8
  Top Layer w4.572: 94.147,-34.696 94.147,-37.937 96.546,-40.335 102.286,-40.335 103.15,-39.472 ; 95.094,-22.483 97.477,-24.867 104.978,-24.867 107.442,-27.33 ; D1.2@97.511,-7.722 101.346,-7.722 107.442,-13.818 ; F1.2 103.15,-63.95 103.15,-39.472 ; D2.2@113.538,-7.722 107.442,-13.818 ; 103.15,-39.472 107.442,-35.179 107.442,-27.33 ; 107.442,-27.33 107.442,-13.818
VOLTAGE_CAP: C14.2 D13.2 JP1.11 R6.2 R20.1 R21.2 | length 107.3
  Top Layer w0.508: v1(43.891,-3.734) 43.891,-37.897 44.272,-38.278 50.394,-38.278 52.146,-36.525 D13.2 52.276,-35.487 56.566,-35.487 57.557,-36.477 R21.2 ; R20.1 R21.2 ; R6.2 60.757,-35.918 58.656,-35.918 R21.2
  Bottom Layer w0.508: JP1.11 -0.025,-2.515 42.647,-2.515 v1@43.993,-3.861
pads on no net: J1.MH1 J2.MH1 J3.MH1 J4.MH1 S2.0 U6.7 U34.5

## Polygon pours and split planes (outlines as drawn)
GND on Bottom Layer "GND_L02_P039" (solid, remove dead copper, pour order 39): -15.316,17.806 -15.316,-36.754 80.442,-36.754 80.264,-36.576 80.264,17.299
GND on Top Layer "GND_L01_P041" (solid, remove dead copper, pour order 41): -15.316,17.908 -15.316,-36.754 80.442,-36.754 80.264,-36.576 80.264,17.402

## Keep-outs
Keep-Out Layer:
  circle w0.254: c71.483,25.563 r1.75
  circle w0.254: c41.363,25.614 r1.75
  lines w0.254: -16.916,-39.268 -13.614,-42.57 -13.614,-48.26 0.285,-48.26 ; -16.908,-39.26 cw(c-14.529,-36.703) -17.976,-37.262 -17.976,-4.47 cw(c-15.892,-4.343) -17.543,-3.066 -15.9,-1.422 -15.9,26.022 ; -15.913,25.628 cw(c-12.967,25.705) -12.903,28.651 ; -13.614,-62.687 ccw(c-11.823,-62.649) -12.572,-64.276 ; -13.563,-62.636 -13.563,-57.582 0.285,-57.582 0.285,-48.412 ; -13.271,28.651 125.806,28.651 cw(c125.73,25.756) 128.626,25.679 128.626,6.198 ; -12.582,-64.293 24.341,-85.473 ; 24.377,-85.409 54.229,-85.409 ; 54.184,-85.417 67.578,-85.417 ; 67.578,-85.429 cw(c67.561,-86.267) 68.399,-86.284 68.399,-99.73 ccw(c69.236,-99.747) 69.219,-100.584 85.573,-100.584 ; 85.523,-100.545 ccw(c85.674,-93.447) 90.67,-98.491 ; 90.702,-98.527 125.079,-67.532 ; 112.17,-58.674 126.069,-58.674 126.069,-65.349 ; 112.17,-58.522 112.17,-49.352 126.018,-49.352 126.018,-41.368 ; 124.996,-67.509 ccw(c123.381,-65.367) 126.064,-65.354 ; 126.094,-41.292 127.61,-39.776 ; 127.453,-39.99 cw(c130.547,-42.125) 129.261,-38.592 ; 128.626,7.214 128.626,-1.336 129.642,-2.352 129.642,-38.3 129.347,-38.595 ; 129.3,-2.011 cw(c128.528,-3.003) 129.705,-3.446

## Other copper
Top Layer:
  pour cut-out: 32.741,-21.107 32.842,-21.006 37.491,-21.006 37.491,-22.352 37.11,-22.733 36.906,-22.53 32.614,-22.53
  pour cut-out: -11.303,-12.04 -5.943,-12.04 -5.791,-12.192 -5.791,-14.09 -11.22,-14.09 -11.303,-14.173
  pour cut-out: -3.505,-18.186 -3.429,-18.263 5.741,-18.263 5.741,-22.758 4.902,-21.92 -3.607,-21.92
Bottom Layer:
  pour cut-out: -9.906,-10.363 -9.88,-10.338 -0.813,-10.338 -0.813,-22.479 -0.889,-22.555 -9.245,-22.555

## Silkscreen, mask and mechanical layers (free items; w line width, h text height)
Top Overlay:
  circle w0.254: c55.872,-19.975 r88
  lines w0.254: -6.02,-0.076 -3.556,-0.076 ; -5.867,10.135 -3.767,10.135 ; -5.486,2.489 -3.429,2.489 ; -5.438,5.029 -3.53,5.029 ; -3.886,7.518 -5.131,7.518 -5.156,7.493 -5.588,7.493 -5.588,12.573 -5.512,12.649 -3.734,12.649 ; -2.159,-66.802 -2.159,-63.729 ; 0,5.08 2.947,5.08 ; 0.051,-0.813 0.051,-1.829 1.118,-2.896 ; 0.813,2.337 0.813,2.007 3.201,-0.381 ; 1.194,7.671 2.972,7.671 ; 1.227,10.185 3.327,10.185 ; 1.346,12.802 2.591,12.802 ; 3.048,7.747 3.048,12.827 ; 9.068,5.131 9.068,5.207 15.113,11.252 18.568,11.252 ; 22.134,-52.959 22.134,-48.174 ; 34.265,-29.362 34.265,-24.333 ; 36.094,-19.975 41.896,-19.975 ; 37.005,-92.579 75.787,-92.583 ; 37.005,-92.456 37.005,22.962 ; 53.823,-31.471 53.823,-21.819 ; 55.165,3.378 55.165,6.676 ; 57.252,-42.596 57.252,-44.328 ; 57.301,-44.377 57.252,-44.328 ; 58.067,-44.328 57.252,-44.328 ; 71.472,3.048 71.472,6.455 ; 75.787,-92.608 75.787,22.962 ; 89.459,-18.037 94.147,-18.037 ; 89.817,-29.949 94.147,-29.949 ; 90.109,-62.012 90.109,-53.975 ; 99.797,21.92 99.797,25.832 ; 115.951,21.92 115.951,25.857
  lines w0.3: 37.059,23.012 75.794,23.012
  text "SHOOT" at 116.688,25.146 h1.52
  text "CHIP" at 100.483,24.917 h1.52
  text "+3.3V" at 14.097,12.014 h1.52
  text "+16V" at 3.988,9.449 h1.52
  text "GND" at -9.957,9.398 h1.52
  text "SHOOT" at 55.481,5.791 h1.52
  text "CHIP" at 72.289,5.69 h1.52
  text "+12V" at 3.378,5.563 h1.52
  text "+3.3V" at -11.633,4.293 h1.52
  text "+5V" at -10.007,1.724 h1.52
  text "+5V" at 32.487,1.521 h1.52
  text "VOL_CAP" at -14.757,-1.092 h1.52
  text "CHIP" at 3.251,-1.854 h1.52
  text "SHOOT" at 0.254,-4.496 h1.52
  text "CAP_IN" at 101.219,-13.792 h1.52
  text "+12V" at -6.782,-17.882 h1.52
  text "SHOOT" at 82.22,-19.202 h1.52
  text "+16V1" at 37.059,-19.533 h1.52
  text "+5V1" at 48.209,-27.229 h1.52
  text "+16V" at 34.951,-29.261 h1.52
  text "CHIP" at 85.065,-30.582 h1.52
  text "5.1K" at 66.396,-38.839 h1.52
  text "300K" at 66.574,-41.938 h1.52
  text "VOL_CAP" at 57.988,-44.958 h1.52
  text "CAP_IN" at 20.168,-47.396 h1.52
  text "CAP_IN" at 82.576,-59.106 h1.52
  text "+16V" at -1.752,-66.421 h1.52
  text "CHARGING" at 110.389,-73.914 h1.02
  text "DONE" at 90.653,-75.006 h1.52
  text "ON" at 107.696,-82.245 h1.52 r45
  text "+" at 83.185,-83.214 h1.02
  text "+" at 27.585,-90.83 h1.02
Mechanical 1:
  circle w0.254: c41.363,25.614 r1.75
  circle w0.254: c71.363,25.614 r1.75
  lines w0.254: -17.978,-37.059 -17.978,-4.47 ; -17.976,-37.059 ccw(c-14.906,-36.884) -16.888,-39.235 ; -17.976,-4.47 cw(c-15.892,-4.343) -17.543,-3.066 ; -16.916,-39.268 -13.614,-42.57 -13.614,-43.332 ; -15.962,25.554 cw(c-12.903,25.554) -12.903,28.613 ; -15.913,25.73 -15.9,-1.422 -17.543,-3.066 ; -13.614,-57.634 0.234,-57.634 0.234,-48.284 -13.589,-48.284 -13.589,-43.358 ; -13.586,-57.662 -13.586,-62.889 ccw(c-12.001,-62.801) -12.624,-64.262 24.306,-85.45 ; -12.852,28.628 125.578,28.628 cw(c125.578,25.58) 128.626,25.58 ; 24.265,-85.403 54.255,-85.403 67.598,-85.403 ; 67.615,-85.42 cw(c67.577,-86.22) 68.377,-86.258 68.377,-99.751 ccw(c69.111,-99.723) 69.139,-100.457 86.259,-100.457 ; 86.208,-100.443 ccw(c86.27,-94.268) 90.831,-98.431 ; 90.6,-98.639 125.078,-67.532 ; 125.135,-67.464 ccw(c123.322,-65.401) 126.069,-65.405 126.069,-58.652 112.247,-58.652 112.247,-49.302 126.095,-49.302 ; 126.077,-47.912 126.077,-41.563 127.102,-40.538 ; 126.098,-49.299 126.098,-47.933 ; 127.132,-40.552 cw(c130.547,-42.125) 129.261,-38.592 ; 128.626,-1.336 128.626,7.214 ; 128.626,6.198 128.626,25.679 ; 128.661,-1.286 129.763,-2.388 ; 129.347,-38.595 129.728,-38.214 ; -17.543,-3.066 -17.543,-3.066 ; 129.728,-38.214 129.728,-2.438 129.728,-38.214

## Text inside footprints (layer, text, board x,y; h text height)
C1: Top Overlay "+" at 7.341,-44.983 h1.02 r90; Top Overlay "-" at 7.468,-32.156 h1.02 r90
C2: Top Overlay "-" at -2.286,-35.179 h1.02 r90; Top Overlay "+" at -2.286,-43.688 h1.02 r90